# Altium PCB ESP8266_SENSOR_PCB_1.PcbDoc
Units mm, origin at the board's own origin, x right, y up, seen from the top; angles counter-clockwise.
Board outline 18.68 x 68.25 mm, 2 copper layers (Top Layer, Bottom Layer); 29 components, 20 nets, 96 pads, 78 vias.
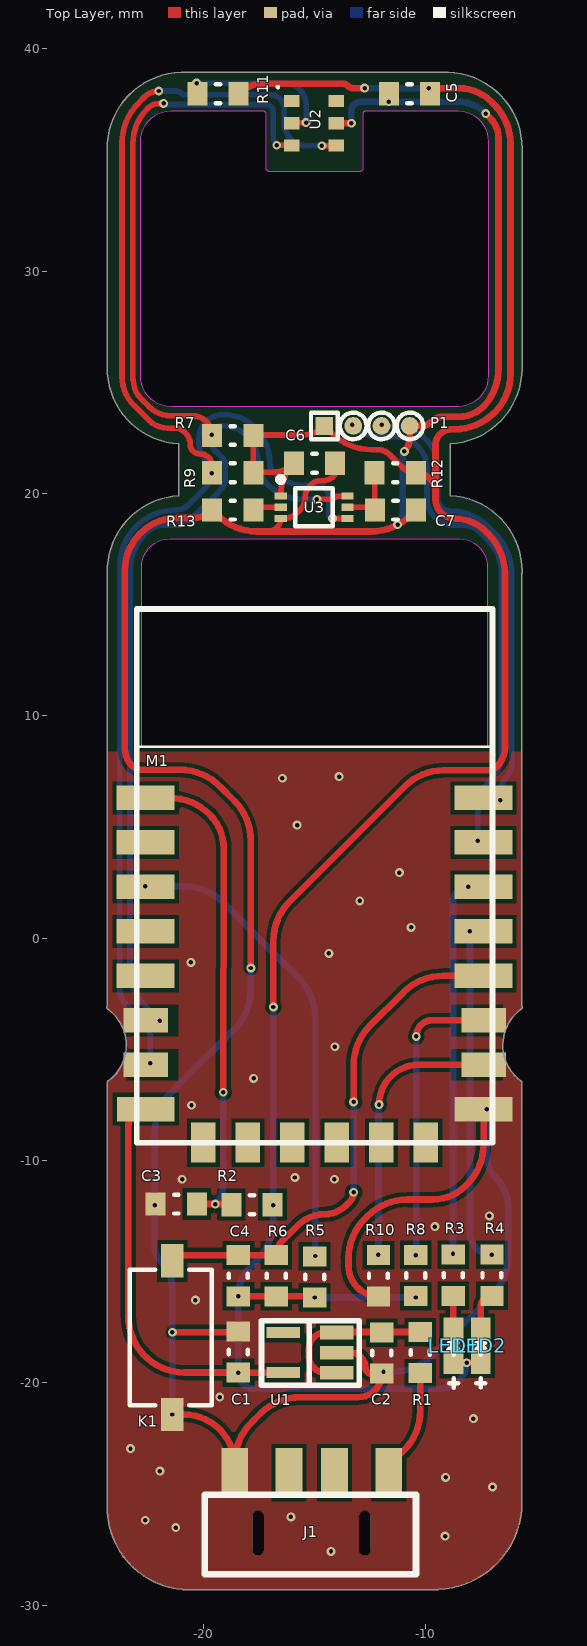
[diagram p0: Top Layer view]
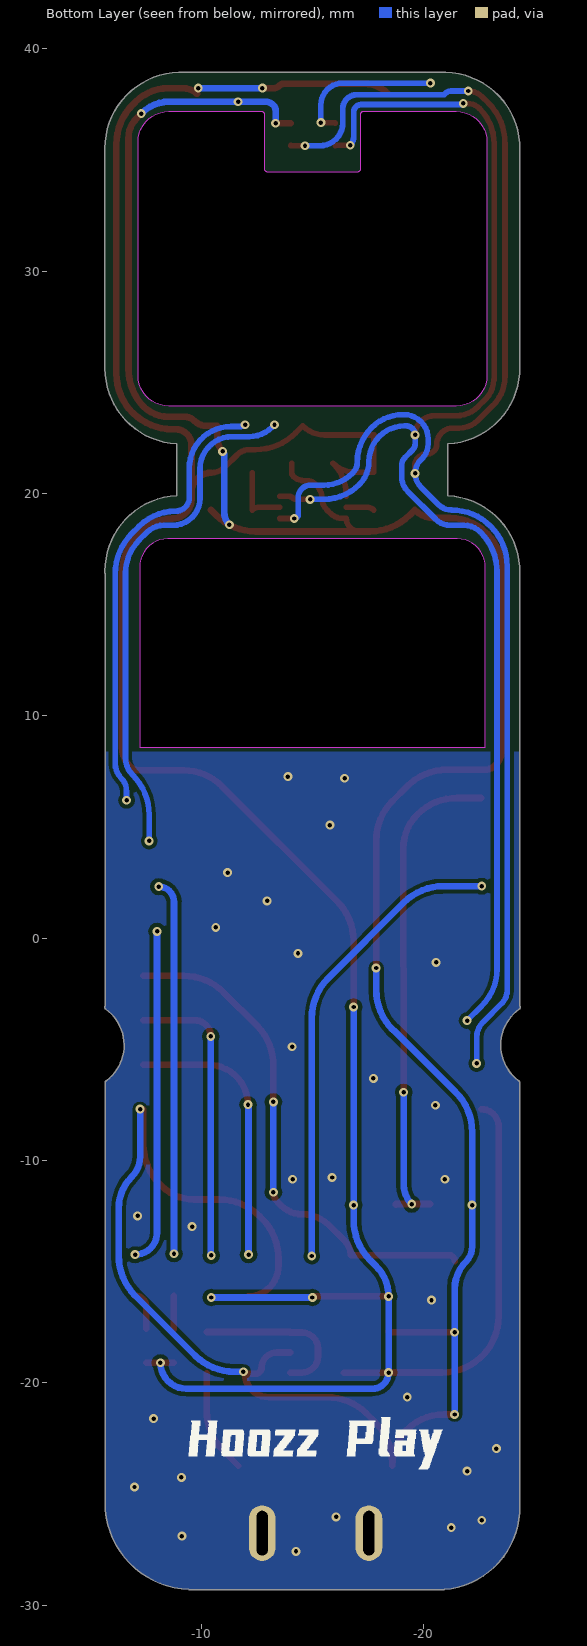
[diagram p1: Bottom Layer view, seen from below]

## Layer stack, top to bottom
Top Solder: solder mask 0.0102, Solder Resist, Dk 3.5
Top Layer: signal copper 0.0356
Dielectric 1: dielectric 0.32, FR-4, Dk 4.8
Bottom Layer: signal copper 0.0356
Bottom Solder: solder mask 0.0102, Solder Resist, Dk 3.5

## Board outline
-24.315,-25.533 -24.315,-6.504 cw(c-24.215,-6.504) -24.245,-6.408 ccw(c-25.468,-4.818) -23.462,-4.818 ccw(c-25.468,-4.818) -24.291,-3.193 cw(c-24.232,-3.112) -24.315,-3.056 -24.315,16.42 cw(c-20.911,16.495) -21.086,19.896 -21.086,22.23 cw(c-20.912,25.63) -24.315,25.706 cw(c-20.912,25.63) -24.315,25.707 -24.315,25.704 -24.315,35.457 cw(c-20.912,35.533) -20.989,38.936 cw(c-20.987,38.836) -20.987,38.936 -8.985,38.936 cw(c-8.985,38.836) -8.983,38.936 cw(c-9.06,35.533) -5.656,35.533 cw(c-9.06,35.533) -5.657,35.457 cw(c-9.06,35.533) -5.657,35.456 -5.657,35.458 -5.657,25.706 cw(c-9.06,25.63) -5.656,25.63 cw(c-9.06,25.63) -8.886,22.23 -8.886,19.902 cw(c-9.06,16.503) -5.656,16.503 cw(c-9.06,16.503) -5.657,16.426 cw(c-5.758,16.428) -5.665,16.389 -5.665,-3.056 cw(c-5.749,-3.112) -5.648,-3.112 cw(c-5.749,-3.112) -5.69,-3.193 ccw(c-4.513,-4.818) -5.736,-6.408 cw(c-5.766,-6.504) -5.665,-6.504 -5.665,-25.314 cw(c-5.766,-25.314) -5.666,-25.326 cw(c-9.566,-25.4) -5.665,-25.4 cw(c-9.566,-25.4) -9.434,-29.299 cw(c-9.48,-29.21) -9.48,-29.31 -20.879,-29.31 cw(c-20.879,-29.21) -20.926,-29.299 cw(c-20.62,-25.614) -24.315,-25.532 cw(c-20.62,-25.614)
cut-out: -22.833,25.298 ccw(c-21.463,25.298) -21.463,23.928 -8.522,23.928 ccw(c-8.522,25.298) -7.151,25.298 -7.151,35.814 ccw(c-8.522,35.814) -8.522,37.184 -12.713,37.184 ccw(c-12.713,37.084) -12.812,37.071 ccw(c-12.713,37.059) -12.813,37.059 -12.813,34.639 cw(c-12.986,34.639) -12.986,34.467 -16.999,34.467 cw(c-16.999,34.639) -17.172,34.639 -17.172,37.059 ccw(c-17.272,37.059) -17.172,37.071 ccw(c-17.272,37.084) -17.172,37.084 ccw(c-17.272,37.084) -17.272,37.184 -21.463,37.184 ccw(c-21.463,35.814) -22.833,35.814
cut-out: -22.771,8.585 -22.771,16.688 cw(c-21.501,16.688) -21.501,17.958 -8.484,17.958 cw(c-8.484,16.688) -7.214,16.688 -7.214,8.585

## Design rules (kind name [scope] priority, off if disabled: settings)
Clearance [All] p1: gap=0.18 ignorepadtopadclearanceinfootprint=FALSE
PlaneConnect [All] p1: planeconnectstyle=Direct reliefexpansion=0.508 reliefentries=4 reliefconductorwidth=0.254 reliefairgap=0.254
PolygonConnect [All] p1: connectstyle=Direct reliefconductorwidth=0.254 reliefentries=4 polygonreliefangle="90 Angle" airgapwidth=0.254
RoutingVias [All] p1: holewidth=0.711 width=1.27 viastyle="Through Hole" minholewidth=0.711 minwidth=1.27 maxholewidth=0.711 maxwidth=1.27
SolderMaskExpansion [All] p1: expansion=0.102
Width [All] p1: maxlimit=2 minlimit=0.254 preferedwidth=0.254
29 further rules are at their usual default settings.

## Components (designator, comment, footprint, x,y, rotation, side; value= is the part's Value field where it differs from the comment)
C1 "Cap" 0603 -18.415,-18.618 r270 top value=1uF
C2 "Cap" 0603 -11.963,-18.669 r90 top value=1uF
C3 "Cap" 0603 -21.209,-11.963 r180 top value=100pF
C4 "Cap" 0603 -18.415,-15.189 r90 top value=100nF
C5 "Cap" 0603 -10.719,37.973 r180 top value=10uF
C6 "Cap" 0603 -14.986,21.361 r0 top value=100nF
C7 "Cap" 0603 -11.354,19.253 r0 top value=100nF
J1 "USBA" USB-A-2 -15.155,-26.314 r180 top
K1 "BUTTON" BUTTON -21.387,-17.958 r270 top
LED1 "RED" LED0603 -8.738,-18.341 r270 top
LED2 "GREEN" LED0603 -7.518,-18.339 r270 top
M1 "ESP-12E&F Module" "ESP-12E&F Module" -14.986,-1.448 r0 top
P1 "TEST-PORT-4P" TEST_PORT_4P -14.574,23.038 r90 top
R1 "Res" 0603 -10.236,-18.644 r90 top value=3R3
R2 "Res" 0603 -17.805,-11.989 r0 top value=10K
R3 "Res" 0603 -8.75,-15.164 r90 top value=1K
R4 "Res" 0603 -7.01,-15.164 r90 top value=3K
R5 "Res" 0603 -14.986,-15.24 r90 top value=10K
R6 "Res" 0603 -16.713,-15.189 r270 top value=10K
R7 "Res" 0603 -18.669,22.606 r180 top value=4.7K
R8 "Res" 0603 -10.439,-15.179 r270 top value=10K
R9 "Res" 0603 -18.669,20.93 r180 top value=4.7K
R10 "Res" 0603 -12.116,-15.189 r90 top value=10K
R11 "Res" 0603 -19.329,37.973 r180 top value=330R
R12 "Res" 0603 -11.358,20.93 r0 top value=1K
R13 "Res" 0603 -18.669,19.253 r0 top value=10K
U1 "ME6211-3.3" SOT-23-5 -15.192,-18.644 r90 top
U2 "AHT20" AHT20 -15.011,36.652 r0 top
U3 "BH1750" BH1750 -15.011,19.38 r0 top

## Footprints (in the part's own frame and the unit in brackets; to place one, negate y for a bottom-side part, rotate by r counter-clockwise, add the part's x,y. Pads: shape width x height; smd on the part's side, far side on the other; paste and mask are expansions set on the pad)
0603 [mm] "2-Leads, Body 2.00x1.00mm, IPC Medium Density"
  rect 0.9x1.05 smd: 1(-0.925,0) 2(0.925,0)
  silkscreen extent -0.1,-0.43 0.1,0.43, body extent -1,-0.5 1,0.5, height 0.6
AHT20 [mm] "AHT20"
  rect 0.7x0.55 smd: 1(-1,1) 2(-1,0) 3(-1,-1) 4(1,-1) 5(1,0) 6(1,1)
  silkscreen extent -1.67,1.58 -1.58,1.67, body extent -1.5,-1.5 1.5,1.5, height 1
BH1750 [mm] "BH1750"
  rect 0.55x0.32 smd: 1(-1.5,0.5) 2(-1.5,0) 3(-1.5,-0.5) 4(1.5,-0.5) 5(1.5,0) 6(1.5,0.5)
  silkscreen extent -1.62,-0.85 0.85,1.37, body extent -1.35,-0.85 1.35,0.85, height 0.75
BUTTON [mm]
  rect 1.5x1 smd: 1(-3.437,0) 2(3.47,0)
  silkscreen extent -3.05,-1.92 3.05,1.78, body extent -3.05,-1.92 3.05,1.78, height 2
"ESP-12E&F Module" [mm]
  rect 2.6x1.1 smd: 1(-7.6,7.75) 2(-7.6,5.75) 3(-7.6,3.75) 4(-7.6,1.75) 5(-7.6,-0.25) 8(-7.6,-6.25) 15(7.6,-6.25) 18(7.6,-0.25) 19(7.6,1.75) 20(7.6,3.75) 21(7.6,5.75) 22(7.6,7.75)
  rect 2x1.1 smd: 6(-7.6,-2.25) 7(-7.6,-4.25) 16(7.6,-4.25) 17(7.6,-2.25)
  rect 1.1x1.8 smd: 9(-5,-7.75) 10(-3,-7.75) 11(-1,-7.75) 12(1,-7.75) 13(3,-7.75) 14(5,-7.75)
  silkscreen extent -8,-7.75 8,16.25
LED0603 [mil]
  rect 40x35 smd: 1(29.92,0) 2(-29.92,0)
  silkscreen extent -12,-10 74,10, body extent -34,-17 37,16, height 20
SOT-23-5 [mm]
  rect 0.6x1.5 smd: 1(-0.9,-1.2) 2(0,-1.2)
  rect 0.63x1.5 smd: 3(0.9,-1.2)
  rect 0.5x1.5 smd: 4(0.9,1.2) 5(-0.9,1.2)
  silkscreen extent -1.47,-2.21 1.43,2.18, body extent -1.38,-0.95 1.3,0.9, height 1
TEST_PORT_4P [mm] "Test port"
  rect 0.8x0.8 smd: 1(0,-0.025)
  round 0.8 smd: 2(0,-1.325) 2(0,-1.325) 3(0,-2.595) 4(0,-3.865)
  silkscreen extent -0.6,-4.47 0.6,0.58
USB-A-2 [mm]
  rect 1.2x2.2 smd: 1(-3.5,-2.275) 2(-1.06,-2.275) 3(0.98,-2.275) 4(3.42,-2.275)
  oval 0.5x2 / inner oval 1.2x2.5 / far side oval 1.2x2.5 hole 0.5 slot 2 at 90 deg: ""(-2.425,0.45) ""(2.375,0.45)
  silkscreen extent -4.72,-1.27 4.78,2.3

## Part data
C1 C2 C3 C4 C5 C6 C7: "Capacitor", LatestRevisionDate=17-Jul-2002, LatestRevisionNote="Re-released for DXP Platform.", PackageDescription="Radial Cap, Thru-Hole; 2 Leads; 0.3 in Pin Spacing", PackageReference=RAD-0.3, Published=8-Jun-2000, Publisher="Altium Limited"
J1: "USB2.0"
LED1 LED2: library part LED
R1 R2 R3 R4 R5 R6 R7 R8 R9 R10 R11 R12 R13: "Resistor", LatestRevisionDate=29-May-2009, LatestRevisionNote="IPC-7351 Footprint Added.", PackageDescription="Chip Resistor", PackageReference=J1-0603, Published=8-Jun-2000, Publisher="Altium Limited"
U1: "No Description Available", Manufacturer="Texas Instruments", Manufacturer_Part_Number=REG102NA-2.5/250, Built_By=EMA_UL_Team, Copyright="Copyright (C) 2018 Accelerated Designs. All rights reserved", RefDes=RefDes, SourceLibrary=TI_2016-07-06, Type=DEV, Vendor="Texas Instruments"

## Via types
v1: diameter 0.4/0.4 (per signal layer), hole 0.2, Top Layer to Bottom Layer, 76 vias
v2: diameter 0.5/0.4 (per signal layer), hole 0.2, Top Layer to Bottom Layer, 2 vias

## Nets (pads, with @x,y where several pads share a name; then routed paths per layer and width w, separated by ;. In a path a pad name is that pad's centre, name@x,y a point inside that pad or via, vN(x,y) a via of type N, cw(c..) or ccw(c..) an arc to the next point about the centre after c; other vN are vias at no path point)
GND: C1.1 C2.1 C3.2 C5.2 C6.2 C7.2 J1. J1.4 K1.2 M1.15 P1.4 R10.1 R13.1 U1.2 U2.5 U3.3 | length 139.8
  Top Layer w0.254: -17.104,18.288 ccw(c-17.104,18.88) U3.3 -16.331,18.88 ccw(c-16.331,19.633) -15.799,19.101 -15.633,19.266 ccw(c-16.154,19.787) -15.418,19.787 cw(c-14.621,19.787) -15.184,20.35 -15.104,20.43 cw(c-14.757,20.083) -14.757,20.574 -14.613,20.574 ccw(c-14.613,21.268) -14.122,20.777 ccw(c-14.271,20.925) -14.061,20.925 C6.2@-14.061,21.357
  Top Layer w0.3: v1(-21.387,-21.428) -20.881,-21.428 cw(c-20.881,-23.735) -18.575,-23.735 -18.575,-23.589 cw(c-16.035,-23.589) -17.831,-21.793 -17.432,-21.394 cw(c-15.636,-23.19) -15.636,-20.65 -13.02,-20.65 ccw(c-13.02,-19.594) C2.1 -12.435,-19.594 cw(c-12.435,-19.329) -12.7,-19.329 ccw(c-13.386,-19.329) -13.386,-18.644 U1.2 ; v1@-21.336,-17.729 -18.451,-17.729 ccw(c-18.451,-17.693) C1.1 ; v1(-17.856,-1.346) -17.856,4.383 ccw(c-20.396,4.383) -18.6,6.18 -19.246,6.825 ccw(c-21.042,5.029) -21.042,7.569 -22.725,7.569 cw(c-22.725,8.263) -23.216,7.772 cw(c-22.48,8.508) -23.52,8.508 -23.52,16.535 cw(c-21.158,16.535) -21.158,18.898 -20.452,18.898 ccw(c-20.452,20.112) R13.1 -19.373,19.032 ccw(c-17.577,20.828) -17.577,18.288 -17.104,18.288 -12.446,18.288 ccw(c-12.446,20.828) -10.65,19.032 C7.2 ; U2.5 v1(-13.335,36.652) ; R10.1 cw(c-12.116,-14.791) -13.052,-15.727 cw(c-12.061,-14.736) -13.462,-14.736 -13.462,-14.402 cw(c-10.947,-14.402) -12.725,-12.624 -12.606,-12.504 cw(c-10.81,-14.3) -10.81,-11.76 -9.676,-11.76 ccw(c-9.676,-9.679) -8.204,-11.151 -8.13,-11.076 ccw(c-9.926,-9.28) -7.386,-9.28 M1.15 ; v1(-10.947,21.895) ccw(c-11.523,22.471) -10.709,22.471 P1.4 -10.229,23.038 ccw(c-10.229,23.818) -9.677,23.266 cw(c-9.251,22.84) -9.251,23.443 -8.53,23.443 ccw(c-8.53,25.058) -7.388,23.916 -7.33,23.974 ; -7.442,23.851 ccw(c-9.203,25.611) -6.713,25.611 -6.713,35.976 ccw(c-7.989,35.976) -7.087,36.878 v1@-7.324,37.116
  Bottom Layer w0.3: v1(-21.387,-21.428) v1(-21.387,-17.729) -21.387,-15.781 ccw(c-23.121,-15.781) -21.895,-14.554 cw(c-21.22,-13.88) -22.174,-13.88 v1(-22.174,-12.014) -22.174,-8.723 cw(c-19.634,-8.723) -21.43,-6.927 -18.687,-4.184 cw(c-18.644,-4.227) -18.644,-4.166 -18.6,-4.122 ccw(c-20.396,-2.326) -17.856,-2.326 v1(-17.856,-1.346) ; v1(-13.335,36.652) -13.335,37.22 cw(c-12.988,37.22) -13.233,37.465 cw(c-12.865,37.097) -12.865,37.617 -8.534,37.617 cw(c-8.534,35.906) v1@-7.324,37.116 ; v1(-11.887,-19.507) -11.492,-19.507 ccw(c-11.492,-16.967) -9.695,-18.763 -7.018,-16.086 ccw(c-8.814,-14.289) -6.274,-14.289 -6.274,-12.155 ccw(c-8.268,-12.155) -6.858,-10.744 cw(c-5.938,-9.824) -7.239,-9.824 v1(-7.239,-7.696) ; v1(-11.252,18.593) ccw(c-11.804,19.145) -11.024,19.145 -11.024,21.711 cw(c-10.763,21.711) v1(-10.947,21.895)
  other v1: -14.249,-27.584 -9.119,-26.899 -21.234,-26.518 -22.606,-26.187 -16.053,-26.035 -6.985,-24.689 -9.093,-24.257 -21.946,-23.978 -23.266,-22.962 -7.849,-21.615 -19.253,-20.65 -20.345,-16.281 -9.576,-12.979 -7.125,-12.497 -20.946,-10.846 -14.097,-10.846 -15.875,-10.77 -20.523,-7.518 -17.729,-6.309 -14.072,-4.885 -20.549,-1.092 -14.341,-0.686 -10.643,0.483 -12.954,1.676 -11.176,2.946 -15.773,5.08 -16.434,7.188 -13.885,7.264 -7.29,37.082 -11.644,37.617
I2C_SCL: M1.6 R7.2 U2.3 U3.6 | length 63
  Top Layer w0.254: v1(-21.775,37.541) -21.953,37.541 ccw(c-21.953,36.761) -22.504,37.313 ccw(c-20.91,35.718) -23.165,35.718 -23.165,25.154 ccw(c-23.081,25.154) -23.14,25.095 ccw(c-21.954,25.095) -22.793,24.256 -22.443,23.906 ccw(c-21.451,24.897) -21.451,23.495 -20.483,23.495 cw(c-20.483,22.606) R7.2 ; v1(-16.688,35.662) -16.021,35.662 U2.3 ; v1(-14.884,19.736) -14.245,19.736 ccw(c-14.245,19.909) -14.122,19.787 cw(c-13.896,19.561) -13.896,19.88 U3.6
  Bottom Layer w0.254: v1(-21.946,-3.708) -22.609,-3.045 cw(c-20.962,-1.397) -23.292,-1.397 -23.292,16.461 cw(c-20.752,16.461) -22.548,18.258 cw(c-21.8,17.51) -21.8,18.567 -21.184,18.567 ccw(c-21.184,19.487) -20.533,18.837 -19.272,20.098 ccw(c-19.931,20.757) -18.999,20.757 -18.999,21.247 ccw(c-19.52,21.247) -19.152,21.615 -19.5,21.964 cw(c-19.237,22.227) -19.609,22.227 v1(-19.609,22.631) cw(c-19.202,22.631) -19.202,23.038 -19.13,23.038 cw(c-19.13,21.438) -17.53,21.438 ccw(c-16.066,21.438) -17.101,20.403 ccw(c-15.49,22.014) -15.49,19.736 v1(-14.884,19.736) ; v1(-21.775,37.541) ccw(c-21.654,37.661) -21.654,37.491 -17.191,37.491 cw(c-17.191,37.141) -16.84,37.141 -16.84,36.03 ccw(c-16.32,36.03) v1(-16.688,35.662)
I2C_SDA: M1.7 R9.2 U2.4 U3.4 | length 71
  Top Layer w0.254: v1(-21.996,38.101) ccw(c-21.996,37.214) -22.624,37.841 -22.903,37.561 ccw(c-21.107,35.765) -23.647,35.765 -23.647,25.248 ccw(c-21.835,25.248) -23.116,23.966 -22.443,23.292 ccw(c-21.584,24.15) -21.584,22.936 -21.285,22.936 cw(c-21.285,22.262) -20.808,22.739 cw(c-21.374,22.173) -20.574,22.173 -20.574,22.165 ccw(c-20.229,22.165) -20.473,21.921 ccw(c-20.119,22.275) -20.119,21.774 cw(c-20.119,21.249) -19.594,21.249 R9.2 ; v1(-14.656,35.636) -14.05,35.636 ccw(c-14.05,35.691) U2.4 ; v1(-14.173,18.872) -13.511,18.872 U3.4
  Bottom Layer w0.254: v1(-22.377,-5.639) -22.377,-4.459 ccw(c-23.331,-4.459) -22.657,-3.785 -23.516,-2.926 cw(c-22.952,-2.362) -23.749,-2.362 -23.749,16.728 cw(c-21.209,16.728) -23.005,18.524 cw(c-21.244,16.763) -21.244,19.253 ccw(c-21.244,20.075) -20.664,19.494 -19.86,20.297 ccw(c-20.467,20.904) v1(-19.609,20.904) ccw(c-20.467,20.904) -19.86,21.511 -19.922,21.573 cw(c-19.269,22.227) -20.193,22.227 -20.193,22.454 cw(c-19.101,22.454) -19.101,23.546 -19.063,23.546 cw(c-19.063,21.551) -17.653,22.962 cw(c-19.22,21.395) -17.004,21.395 ccw(c-16.338,21.395) -16.809,20.924 -16.795,20.91 ccw(c-15.494,22.21) -15.494,20.371 -14.91,20.371 cw(c-14.91,19.812) -14.351,19.812 -14.351,19.05 ccw(c-14.173,19.05) v1(-14.173,18.872) ; v1(-21.996,38.101) -21.227,38.101 cw(c-21.227,37.752) -20.98,37.998 ccw(c-20.612,38.366) -20.889,37.925 -16.97,37.925 cw(c-16.97,37.313) -16.358,37.313 -16.358,36.678 ccw(c-15.316,36.678) -15.316,35.636 v1(-14.656,35.636)
NetC2_2: C2.2 R1.2 U1.1 U1.3 | length 7.4
  Top Layer w0.3: U1.1 -14.518,-19.544 cw(c-14.518,-18.821) -15.24,-18.821 -15.24,-18.466 cw(c-14.518,-18.466) -14.518,-17.744 U1.3 cw(c-13.967,-17.744) -13.967,-17.719 R1.2
NetC3_1: C3.1 M1.1 R2.1 | length 22.7
  Top Layer w0.3: M1.1 -21.502,6.302 cw(c-21.502,3.762) -19.706,5.558 cw(c-21.229,4.036) -19.075,4.036 ; C3.1 v1(-19.456,-11.963) -18.756,-11.963 cw(c-18.756,-11.989) R2.1 ; v1(-19.093,-6.934) -19.075,4.264
  Bottom Layer w0.3: v1(-19.456,-11.963) ccw(c-20.333,-11.087) -19.093,-11.087 v1(-19.093,-6.934)
NetC4_2: C4.2 K1.1 M1.18 R6.1 | length 23.3
  Top Layer w0.3: K1.1 cw(c-21.13,-14.521) -21.13,-14.264 C4.2 R6.1 cw(c-15.819,-14.264) -16.451,-13.632 -15.743,-12.923 cw(c-14.529,-14.138) -14.529,-12.421 ccw(c-14.529,-11.072) -13.575,-12.025 -13.413,-11.864 ccw(c-13.847,-11.43) v1(-13.233,-11.43) ; v1(-13.233,-7.366) -13.233,-5.731 cw(c-10.693,-5.731) -12.489,-3.935 -10.996,-2.442 cw(c-9.2,-4.238) -9.2,-1.698 M1.18
  Bottom Layer w0.3: v1(-13.233,-11.43) v1(-13.233,-7.366)
NetC7_1: C7.1 R12.1 U3.5 | length 2.9
  Top Layer w0.254: U3.5 -12.585,19.38 cw(c-12.585,18.947) C7.1@-12.283,19.257 ; R12.1 C7.1@-12.283,19.257 ; C7.1 C7.1@-12.283,19.257
NetJ1_1: J1.1 R1.1 | length 4.6
  Top Layer w0.3: J1.1@-11.655,-23.735 -10.98,-23.06 ccw(c-12.776,-21.264) -10.236,-21.264 R1.1
NetLED1_2: LED1.2 R3.1 | length 1.5
  Top Layer w0.3: R3.1 -8.75,-17.581 LED1.2
NetLED2_2: LED2.2 R4.1 | length 1.8
  Top Layer w0.3: LED2.2 -7.518,-16.597 cw(c-7.01,-16.597) R4.1
NetM1_3: M1.3 R5.2 | length 21.2
  Bottom Layer w0.3: v1(-22.606,2.337) -20.89,2.337 cw(c-20.89,-0.203) -19.093,1.593 -15.705,-1.796 cw(c-17.501,-3.592) -14.961,-3.592 v1(-14.961,-14.3)
NetM1_16: M1.16 R10.2 | length 12.5
  Top Layer w0.3: v1(-12.09,-7.493) cw(c-10.295,-7.493) -10.295,-5.698 M1.16
  Bottom Layer w0.3: v1(-12.116,-14.239) v1@-12.116,-7.493
NetM1_17: M1.17 R8.1 | length 13.3
  Top Layer w0.3: v1(-10.414,-4.42) cw(c-9.692,-4.42) -9.692,-3.698 M1.17
  Bottom Layer w0.3: v1(-10.439,-14.275) -10.414,-14.249 v1(-10.414,-4.42)
NetM1_19: M1.19 R4.2 | length 15.1
  Bottom Layer w0.3: v1(-8.001,0.305) -8.001,-13.248 ccw(c-7.01,-13.248) v1(-7.01,-14.239)
NetM1_20: M1.20 R3.2 | length 16.9
  Bottom Layer w0.3: v1(-8.763,-14.199) -8.763,1.626 cw(c-8.077,1.626) v1(-8.077,2.311)
NetR11_2: R11.2 U2.2 | length 7
  Top Layer w0.254: U2.2 cw(c-15.95,36.591) -15.95,36.678 v1(-15.367,36.678)
  Bottom Layer w0.254: v1(-20.295,38.456) -16.358,38.456 cw(c-16.358,37.465) -15.367,37.465 v1(-15.367,36.678) ccw(c-15.367,36.701) v1@-15.344,36.701
NetR13_2: R13.2 U3.2 | length 1.3
  Top Layer w0.254: R13.2 cw(c-17.437,18.947) -17.437,19.38 U3.2
UART_RX: M1.21 P1.2 | length 23.3
  Bottom Layer w0.254: v1(-13.284,23.089) -13.182,22.986 ccw(c-12.141,24.027) -12.141,22.555 -11.379,22.555 cw(c-11.379,21.107) -9.931,21.107 -9.931,19.787 ccw(c-8.712,19.787) -8.712,18.567 -8.306,18.567 cw(c-8.306,17.503) -7.553,18.256 -7.196,17.899 cw(c-8.688,16.408) -6.579,16.408 -6.579,8.116 cw(c-7.681,8.116) -6.901,7.337 ccw(c-5.105,5.541) -7.645,5.541 v1(-7.645,4.369)
UART_TX: M1.22 P1.3 | length 20.5
  Bottom Layer w0.254: v1(-11.963,23.089) ccw(c-11.779,23.273) -11.779,23.012 -11.328,23.012 cw(c-11.328,21.133) -9.449,21.133 -9.449,19.812 ccw(c-8.839,19.812) -8.839,19.202 cw(c-8.839,16.872) -7.192,18.52 -6.865,18.194 cw(c-8.661,16.398) -6.121,16.398 -6.121,7.827 cw(c-6.989,7.827) -6.375,7.214 ccw(c-5.762,6.6) -6.629,6.6 v1(-6.629,6.198)
VDD3V3: C1.2 C4.1 C5.1 C6.1 LED1.1 LED2.1 M1.8 P1.1 R2.2 R5.1 R6.2 R7.1 R8.2 R9.1 R11.1 R12.2 U1.5 U3.1 | length 132.7
  Top Layer w0.254: U3.1 -16.511,19.912 cw(c-14.462,19.912) C6.1@-15.912,21.36 ; C6.1 cw(c-16.892,22.343) C6.1@-15.912,21.36 ; R12.2 cw(c-10.433,21.804) -11.051,21.186 -11.608,21.742 ccw(c-12.16,21.191) -12.16,21.971 -12.43,21.971 cw(c-12.43,24.511) -14.226,22.715 P1.1 cw(c-15.53,24.019) -15.53,22.631 -17.769,22.631 cw(c-17.831,22.57) -17.744,22.57 -17.744,20.955 -16.892,20.955 ccw(c-16.892,22.343) C6.1@-15.912,21.36
  Top Layer w0.3: M1.8 ccw(c-22.586,-8.48) -23.368,-8.48 -23.368,-17.003 ccw(c-20.828,-17.003) -20.828,-19.543 v1(-18.415,-19.543) ; v1(-18.415,-19.543) U1.5 ; v1(-18.415,-16.114) R6.2 -15.037,-16.114 cw(c-15.037,-16.165) v2(-14.986,-16.165) ; R11.1 cw(c-17.301,36.869) -17.301,38.43 -13.733,38.43 cw(c-13.733,38.083) -13.487,38.329 ccw(c-13.242,38.574) -13.242,38.227 v1(-12.74,38.227) ; v1(-16.84,-3.099) -16.84,-0.138 cw(c-14.3,-0.138) -16.096,1.658 -10.929,6.825 cw(c-9.195,5.091) -9.195,7.544 -7.211,7.544 ccw(c-7.211,8.151) -6.782,7.722 ccw(c-7.64,8.58) -6.426,8.58 -6.426,16.375 ccw(c-8.966,16.375) -7.17,18.171 -7.295,18.296 ccw(c-8.687,16.904) -8.687,18.872 cw(c-8.687,19.734) -9.549,19.734 -9.549,20.045 ; R12.2 cw(c-10.433,20.045) -9.549,20.045 ; C5.1 cw(c-9.181,37.36) -9.181,38.227 -8.522,38.227 cw(c-8.522,36.111) -7.026,37.607 -6.916,37.498 cw(c-8.712,35.702) -6.172,35.702 -6.172,25.39 cw(c-8.662,25.39) -6.901,23.629 cw(c-8.698,25.425) -8.698,22.885 -8.839,22.885 ccw(c-8.839,22.176) -9.549,22.176 -9.549,20.045 ; LED1.1 -8.738,-19.099 LED2.1
  Bottom Layer w0.3: v1(-16.84,-3.099) v1(-16.84,-12.014) -16.84,-12.689 cw(c-19.38,-12.689) -17.584,-14.485 -17.851,-14.752 ccw(c-16.488,-16.114) v1(-18.415,-16.114) v1(-18.415,-19.543) ccw(c-17.689,-19.543) -17.689,-20.269 -9.322,-20.269 ccw(c-9.322,-19.101) v1(-8.153,-19.101) ; v2(-14.986,-16.165) v2(-10.439,-16.165) ; v1(-12.74,38.227) v1(-9.855,38.227)
pads on no net: J1.2 J1.3 M1.2 M1.4 M1.5 M1.9 M1.10 M1.11 M1.12 M1.13 M1.14 U1.4 U2.1 U2.6

## Polygon pours and split planes (outlines as drawn)
GND on Top Layer "GND_L01_P011" (solid, pour order 11): -24.315,-25.533 -24.315,-6.504 cw(c-24.215,-6.504) -24.245,-6.408 ccw(c-25.468,-4.818) -23.462,-4.818 ccw(c-25.468,-4.818) -24.291,-3.193 cw(c-24.232,-3.112) -24.315,-3.056 -24.315,16.42 cw(c-20.911,16.495) -21.086,19.896 -21.086,22.23 cw(c-20.912,25.63) -24.315,25.706 cw(c-20.912,25.63) -24.315,25.707 -24.315,25.704 -24.315,35.457 cw(c-20.912,35.533) -20.989,38.936 cw(c-20.987,38.836) -20.987,38.936 -8.985,38.936 cw(c-8.985,38.836) -8.983,38.936 cw(c-9.06,35.533) -5.656,35.533 cw(c-9.06,35.533) -5.657,35.457 cw(c-9.06,35.533) -5.657,35.456 -5.657,35.458 -5.657,25.706 cw(c-9.06,25.63) -5.656,25.63 cw(c-9.06,25.63) -8.886,22.23 -8.886,19.902 cw(c-9.06,16.503) -5.656,16.503 cw(c-9.06,16.503) -5.657,16.426 cw(c-5.758,16.428) -5.665,16.389 -5.665,-3.056 cw(c-5.749,-3.112) -5.648,-3.112 cw(c-5.749,-3.112) -5.69,-3.193 ccw(c-4.513,-4.818) -5.736,-6.408 cw(c-5.766,-6.504) -5.665,-6.504 -5.665,-25.314 cw(c-5.766,-25.314) -5.666,-25.326 cw(c-9.567,-25.4) -5.665,-25.4 cw(c-9.566,-25.4) -9.434,-29.299 cw(c-9.48,-29.21) -9.48,-29.31 -20.879,-29.31 cw(c-20.879,-29.21) -20.926,-29.299 cw(c-20.62,-25.614) -24.315,-25.532 cw(c-26.98,-25.533)
GND on Bottom Layer "GND_L02_P012" (solid, pour order 12): -24.315,-25.533 -24.315,-6.504 cw(c-24.215,-6.504) -24.245,-6.408 ccw(c-25.468,-4.818) -23.462,-4.818 ccw(c-25.468,-4.818) -24.291,-3.193 cw(c-24.232,-3.112) -24.315,-3.056 -24.315,16.42 cw(c-20.911,16.495) -21.086,19.896 -21.086,22.23 cw(c-20.912,25.63) -24.315,25.706 cw(c-20.912,25.63) -24.315,25.707 -24.315,25.704 -24.315,35.457 cw(c-20.912,35.533) -20.989,38.936 cw(c-20.987,38.836) -20.987,38.936 -8.985,38.936 cw(c-8.985,38.836) -8.983,38.936 cw(c-9.06,35.533) -5.656,35.533 cw(c-9.06,35.533) -5.657,35.457 cw(c-9.06,35.533) -5.657,35.456 -5.657,35.458 -5.657,25.706 cw(c-9.06,25.63) -5.656,25.63 cw(c-9.06,25.63) -8.886,22.23 -8.886,19.902 cw(c-9.06,16.503) -5.656,16.503 cw(c-9.06,16.503) -5.657,16.426 cw(c-5.758,16.428) -5.665,16.389 -5.665,-3.056 cw(c-5.749,-3.112) -5.648,-3.112 cw(c-5.749,-3.112) -5.69,-3.193 ccw(c-4.513,-4.818) -5.736,-6.408 cw(c-5.766,-6.504) -5.665,-6.504 -5.665,-25.314 cw(c-5.766,-25.314) -5.666,-25.326 cw(c-9.567,-25.4) -5.665,-25.4 cw(c-9.566,-25.4) -9.434,-29.299 cw(c-9.48,-29.21) -9.48,-29.31 -20.879,-29.31 cw(c-20.879,-29.21) -20.926,-29.299 cw(c-20.62,-25.614) -24.315,-25.532 cw(c-26.98,-25.533)

## Other copper
Top Layer:
  pour cut-out: -4.547,39.573 -4.547,8.382 -25.527,8.382 -25.527,39.573
Bottom Layer:
  pour cut-out: -4.547,39.548 -4.547,8.382 -25.527,8.382 -25.527,39.548

## Silkscreen, mask and mechanical layers (free items; w line width, h text height)
Top Overlay:
  text ".Layer_Name" at -41.885,22.047 h1
Bottom Overlay:
  drawing of 9 lines, arcs and shapes, not listed
  text ".Layer_Name" at 16.104,22.454 h1
Mechanical 1:
  lines w0.2: -24.232,-3.112 cw(c-25.468,-4.818) -24.205,-6.504 ; -24.215,-6.504 -24.215,-25.533 ccw(c-20.62,-25.614) -20.701,-29.21 ; -24.215,-3.112 -24.215,16.421 cw(c-20.911,16.495) -20.986,19.8 ; -22.771,8.585 -22.771,14.806 -22.771,16.688 cw(c-21.501,16.688) -21.501,17.958 -8.484,17.958 cw(c-8.484,16.688) -7.214,16.688 -7.214,16.332 -7.214,14.806 -7.214,8.585 -22.758,8.585 ; -20.987,22.327 cw(c-20.912,25.63) -24.214,25.704 -24.214,35.458 cw(c-20.912,35.533) -20.987,38.836 -8.985,38.836 cw(c-9.06,35.533) -5.758,35.458 -5.758,25.704 cw(c-9.06,25.63) -8.985,22.327 ; -20.986,19.806 -20.986,22.327 ; -20.879,-29.21 -9.48,-29.21 ; -17.272,37.059 -17.272,34.639 ccw(c-16.999,34.639) -16.999,34.366 -12.986,34.366 ccw(c-12.986,34.639) -12.713,34.639 -12.713,37.059 ; -17.272,37.084 -21.463,37.084 ccw(c-21.463,35.814) -22.733,35.814 -22.733,25.298 ccw(c-21.463,25.298) -21.463,24.028 -20.99,24.028 -8.995,24.028 -8.522,24.028 ccw(c-8.522,25.298) -7.252,25.298 -7.252,35.814 ccw(c-8.522,35.814) -8.522,37.084 -12.713,37.084 ; -9.48,-29.2 ccw(c-9.566,-25.4) -5.767,-25.314 ; -8.986,19.806 -8.986,22.327 ; -8.985,19.806 cw(c-9.06,16.503) -5.758,16.428 ; -5.776,-6.504 cw(c-4.513,-4.818) -5.749,-3.112 ; -5.766,-25.314 -5.766,-6.504 ; -5.766,-3.112 -5.766,16.428